# Altium PCB PCB.PcbDoc (part 2 of 3)
Units mm, origin at the board's own origin, x right, y up, seen from the top; angles counter-clockwise.
Board outline 58.5 x 91.95 mm, 2 copper layers (Top Layer, Bottom Layer), stack 1.571 mm thick; 57 components, 46 nets, 183 pads, 18 vias.
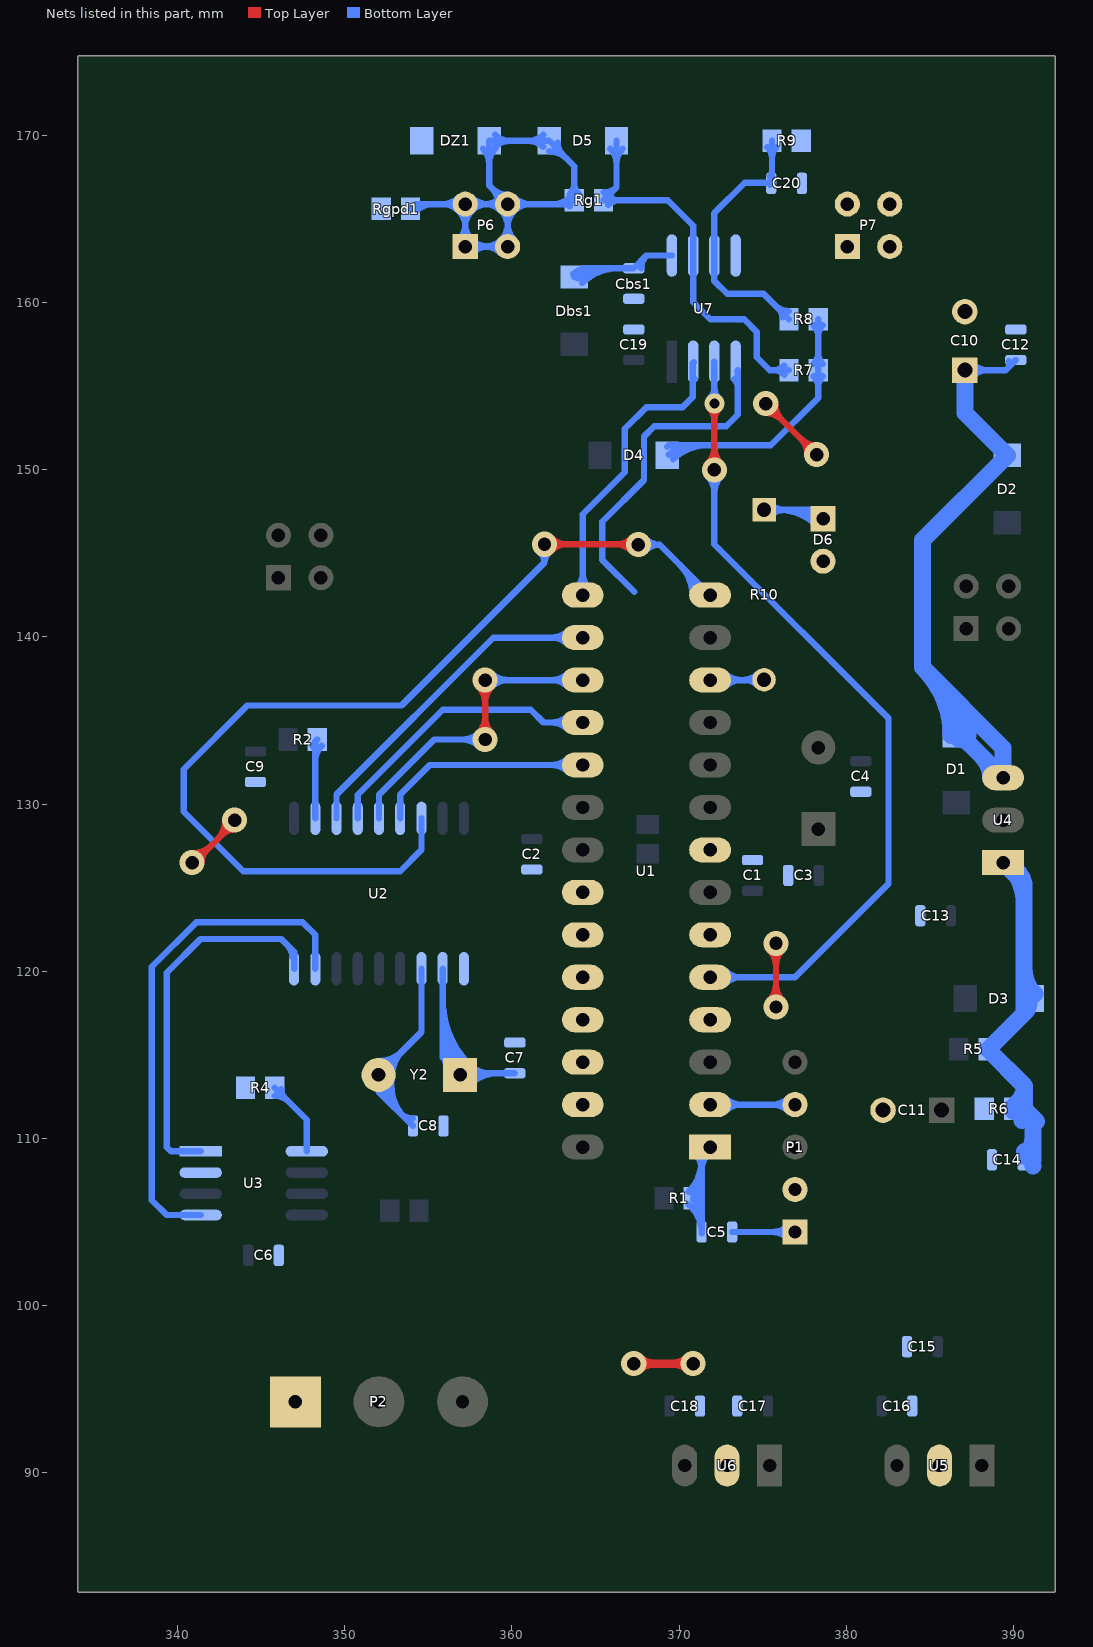
[diagram p2: the nets of this part, all layers, seen from the top]

## Via types
v1: diameter 1.5, hole 0.8, Top Layer to Bottom Layer, 17 vias
v2: diameter 1.2, hole 0.6, Top Layer to Bottom Layer, 1 vias

## Nets (pads, with @x,y where several pads share a name; then routed paths per layer and width w, separated by ;. In a path a pad name is that pad's centre, name@x,y a point inside that pad or via, vN(x,y) a via of type N, cw(c..) or ccw(c..) an arc to the next point about the centre after c; other vN are vias at no path point) (continued)
GATE: D5.1 DZ1.2 P6.1 P6.2 P6.3 P6.4 Rg1.1 Rgpd1.1 | length 170.1
  Bottom Layer w0.381: Rgpd1.1@353.935,165.608 354.215,165.888 P6.2@357.203,165.888 ; Rg1.1@363.5,165.888 P6.4@359.743,165.888 ; Rg1.1@363.728,166.116 363.728,168.165 D5.1@362.221,169.672 DZ1.2@358.631,169.672 358.631,167 P6.4@359.743,165.888 ; Rgpd1.1@354.207,165.436 cw(c355.298,164.345) 355.298,165.888 ; Rgpd1.1@354.207,165.436 cw(c355.298,164.345) 355.298,165.888 ; Rgpd1.1@354.207,165.436 cw(c355.298,164.345) 355.298,165.888 ; Rgpd1.1@354.207,165.436 cw(c355.298,164.345) 355.298,165.888 ; 355.853,165.888 cw(c355.853,164.537) P6.2@356.808,165.492 ; 355.853,165.888 ccw(c355.853,167.239) P6.2@356.808,166.284 ; 355.853,165.888 cw(c355.853,164.537) P6.2@356.808,165.492 ; 355.853,165.888 ccw(c355.853,167.239) P6.2@356.808,166.284 ; 355.853,165.888 cw(c355.853,164.537) P6.2@356.808,165.492 ; 355.853,165.888 ccw(c355.853,167.239) P6.2@356.808,166.284 ; 355.853,165.888 cw(c355.853,164.537) P6.2@356.808,165.492 ; 355.853,165.888 ccw(c355.853,167.239) P6.2@356.808,166.284 ; P6.1@356.808,163.744 ccw(c355.853,164.699) 357.203,164.699 ; P6.1@356.808,163.744 ccw(c355.853,164.699) 357.203,164.699 ; P6.1@356.808,163.744 ccw(c355.853,164.699) 357.203,164.699 ; P6.1@356.808,163.744 ccw(c355.853,164.699) 357.203,164.699 ; P6.2@356.808,165.492 cw(c355.853,164.537) 357.203,164.537 ; P6.2@356.808,165.492 cw(c355.853,164.537) 357.203,164.537 ; P6.2@356.808,165.492 cw(c355.853,164.537) 357.203,164.537 ; P6.2@356.808,165.492 cw(c355.853,164.537) 357.203,164.537 ; 357.203,164.537 cw(c358.554,164.537) P6.2@357.599,165.492 ; 357.203,164.537 cw(c358.554,164.537) P6.2@357.599,165.492 ; 357.203,164.537 cw(c358.554,164.537) P6.2@357.599,165.492 ; 357.203,164.537 cw(c358.554,164.537) P6.2@357.599,165.492 ; 357.203,164.699 ccw(c358.554,164.699) P6.1@357.599,163.744 ; 357.203,164.699 ccw(c358.554,164.699) P6.1@357.599,163.744 ; 357.203,164.699 ccw(c358.554,164.699) P6.1@357.599,163.744 ; 357.203,164.699 ccw(c358.554,164.699) P6.1@357.599,163.744 ; P6.2@357.203,165.888 P6.4@359.743,165.888 ; P6.2@357.203,165.888 P6.1@357.203,163.348 P6.3@359.743,163.348 P6.4@359.743,165.888 ; P6.1@357.599,162.952 cw(c358.554,161.997) 358.554,163.348 ; P6.1@357.599,162.952 cw(c358.554,161.997) 358.554,163.348 ; P6.1@357.599,162.952 cw(c358.554,161.997) 358.554,163.348 ; P6.1@357.599,162.952 cw(c358.554,161.997) 358.554,163.348 ; P6.1@357.599,163.744 ccw(c358.554,164.699) 358.554,163.348 ; P6.1@357.599,163.744 ccw(c358.554,164.699) 358.554,163.348 ; P6.1@357.599,163.744 ccw(c358.554,164.699) 358.554,163.348 ; P6.1@357.599,163.744 ccw(c358.554,164.699) 358.554,163.348 ; P6.2@357.599,165.492 cw(c358.554,164.537) 358.554,165.888 ; P6.2@357.599,165.492 cw(c358.554,164.537) 358.554,165.888 ; P6.2@357.599,165.492 cw(c358.554,164.537) 358.554,165.888 ; P6.2@357.599,165.492 cw(c358.554,164.537) 358.554,165.888 ; P6.2@357.599,166.284 ccw(c358.554,167.239) 358.554,165.888 ; P6.2@357.599,166.284 ccw(c358.554,167.239) 358.554,165.888 ; P6.2@357.599,166.284 ccw(c358.554,167.239) 358.554,165.888 ; P6.2@357.599,166.284 ccw(c358.554,167.239) 358.554,165.888 ; DZ1.2@358.271,169.192 cw(c357.401,168.322) 358.631,168.322 ; DZ1.2@358.271,169.192 cw(c357.401,168.322) 358.631,168.322 ; DZ1.2@358.271,169.192 cw(c357.401,168.322) 358.631,168.322 ; DZ1.2@358.271,169.192 cw(c357.401,168.322) 358.631,168.322 ; 358.393,163.348 cw(c358.393,161.997) P6.3@359.348,162.952 ; 358.393,163.348 ccw(c358.393,164.699) P6.3@359.348,163.744 ; 358.393,163.348 cw(c358.393,161.997) P6.3@359.348,162.952 ; 358.393,163.348 ccw(c358.393,164.699) P6.3@359.348,163.744 ; 358.393,163.348 cw(c358.393,161.997) P6.3@359.348,162.952 ; 358.393,163.348 ccw(c358.393,164.699) P6.3@359.348,163.744 ; 358.393,163.348 cw(c358.393,161.997) P6.3@359.348,162.952 ; 358.393,163.348 ccw(c358.393,164.699) P6.3@359.348,163.744 ; 358.393,165.888 cw(c358.393,164.537) P6.4@359.348,165.492 ; 358.393,165.888 ccw(c358.393,167.239) P6.4@359.348,166.284 ; 358.393,165.888 cw(c358.393,164.537) P6.4@359.348,165.492 ; 358.393,165.888 ccw(c358.393,167.239) P6.4@359.348,166.284 ; 358.393,165.888 cw(c358.393,164.537) P6.4@359.348,165.492 ; 358.393,165.888 ccw(c358.393,167.239) P6.4@359.348,166.284 ; 358.393,165.888 cw(c358.393,164.537) P6.4@359.348,165.492 ; 358.393,165.888 ccw(c358.393,167.239) P6.4@359.348,166.284 ; 358.631,168.322 cw(c359.861,168.322) DZ1.2@358.991,169.192 ; 358.631,168.322 cw(c359.861,168.322) DZ1.2@358.991,169.192 ; 358.631,168.322 cw(c359.861,168.322) DZ1.2@358.991,169.192 ; 358.631,168.322 cw(c359.861,168.322) DZ1.2@358.991,169.192 ; 358.788,166.843 cw(c357.833,165.888) P6.4@359.184,165.888 ; 358.788,166.843 ccw(c359.743,167.798) P6.4@359.743,166.447 ; 358.788,166.843 cw(c357.833,165.888) P6.4@359.184,165.888 ; 358.788,166.843 ccw(c359.743,167.798) P6.4@359.743,166.447 ; 358.788,166.843 cw(c357.833,165.888) P6.4@359.184,165.888 ; 358.788,166.843 ccw(c359.743,167.798) P6.4@359.743,166.447 ; 358.788,166.843 cw(c357.833,165.888) P6.4@359.184,165.888 ; 358.788,166.843 ccw(c359.743,167.798) P6.4@359.743,166.447 ; DZ1.2@358.991,169.312 cw(c359.861,168.442) 359.861,169.672 ; DZ1.2@358.991,169.312 cw(c359.861,168.442) 359.861,169.672 ; DZ1.2@358.991,169.312 cw(c359.861,168.442) 359.861,169.672 ; DZ1.2@358.991,169.312 cw(c359.861,168.442) 359.861,169.672 ; DZ1.2@358.991,170.032 ccw(c359.861,170.902) 359.861,169.672 ; DZ1.2@358.991,170.032 ccw(c359.861,170.902) 359.861,169.672 ; DZ1.2@358.991,170.032 ccw(c359.861,170.902) 359.861,169.672 ; DZ1.2@358.991,170.032 ccw(c359.861,170.902) 359.861,169.672 ; P6.3@359.348,163.744 ccw(c358.393,164.699) 359.743,164.699 ; P6.3@359.348,163.744 ccw(c358.393,164.699) 359.743,164.699 ; P6.3@359.348,163.744 ccw(c358.393,164.699) 359.743,164.699 ; P6.3@359.348,163.744 ccw(c358.393,164.699) 359.743,164.699 ; P6.4@359.348,165.492 cw(c358.393,164.537) 359.743,164.537 ; P6.4@359.348,165.492 cw(c358.393,164.537) 359.743,164.537 ; P6.4@359.348,165.492 cw(c358.393,164.537) 359.743,164.537 ; P6.4@359.348,165.492 cw(c358.393,164.537) 359.743,164.537 ; 359.743,164.537 cw(c361.094,164.537) P6.4@360.139,165.492 ; 359.743,164.537 cw(c361.094,164.537) P6.4@360.139,165.492 ; 359.743,164.537 cw(c361.094,164.537) P6.4@360.139,165.492 ; 359.743,164.537 cw(c361.094,164.537) P6.4@360.139,165.492 ; 359.743,164.699 ccw(c361.094,164.699) P6.3@360.139,163.744 ; 359.743,164.699 ccw(c361.094,164.699) P6.3@360.139,163.744 ; 359.743,164.699 ccw(c361.094,164.699) P6.3@360.139,163.744 ; 359.743,164.699 ccw(c361.094,164.699) P6.3@360.139,163.744 ; P6.4@360.139,165.492 cw(c361.094,164.537) 361.094,165.888 ; P6.4@360.139,165.492 cw(c361.094,164.537) 361.094,165.888 ; P6.4@360.139,165.492 cw(c361.094,164.537) 361.094,165.888 ; P6.4@360.139,165.492 cw(c361.094,164.537) 361.094,165.888 ; P6.4@360.139,166.284 ccw(c361.094,167.239) 361.094,165.888 ; P6.4@360.139,166.284 ccw(c361.094,167.239) 361.094,165.888 ; P6.4@360.139,166.284 ccw(c361.094,167.239) 361.094,165.888 ; P6.4@360.139,166.284 ccw(c361.094,167.239) 361.094,165.888 ; 360.991,169.672 cw(c360.991,168.442) D5.1@361.861,169.312 ; 360.991,169.672 ccw(c360.991,170.902) D5.1@361.861,170.032 ; 360.991,169.672 cw(c360.991,168.442) D5.1@361.861,169.312 ; 360.991,169.672 ccw(c360.991,170.902) D5.1@361.861,170.032 ; 360.991,169.672 cw(c360.991,168.442) D5.1@361.861,169.312 ; 360.991,169.672 ccw(c360.991,170.902) D5.1@361.861,170.032 ; 360.991,169.672 cw(c360.991,168.442) D5.1@361.861,169.312 ; 360.991,169.672 ccw(c360.991,170.902) D5.1@361.861,170.032 ; D5.1@362.221,169.043 cw(c362.221,167.523) 363.296,168.597 ; D5.1@362.221,169.043 cw(c362.221,167.523) 363.296,168.597 ; D5.1@362.221,169.043 cw(c362.221,167.523) 363.296,168.597 ; D5.1@362.221,169.043 cw(c362.221,167.523) 363.296,168.597 ; 362.491,165.888 ccw(c362.491,167.253) Rg1.1@363.456,166.288 ; 362.491,165.888 ccw(c362.491,167.253) Rg1.1@363.456,166.288 ; 362.491,165.888 ccw(c362.491,167.253) Rg1.1@363.456,166.288 ; 362.491,165.888 ccw(c362.491,167.253) Rg1.1@363.456,166.288 ; D5.1@362.73,169.552 ccw(c363.671,169.552) 363.006,168.887 ; D5.1@362.73,169.552 ccw(c363.671,169.552) 363.006,168.887 ; D5.1@362.73,169.552 ccw(c363.671,169.552) 363.006,168.887 ; D5.1@362.73,169.552 ccw(c363.671,169.552) 363.006,168.887 ; 363.109,165.888 cw(c363.109,165.397) Rg1.1@363.456,165.744 ; 363.109,165.888 cw(c363.109,165.397) Rg1.1@363.456,165.744 ; 363.109,165.888 cw(c363.109,165.397) Rg1.1@363.456,165.744 ; 363.109,165.888 cw(c363.109,165.397) Rg1.1@363.456,165.744 ; Rg1.1@363.456,166.488 ccw(c362.8,167.144) 363.728,167.144 ; Rg1.1@363.456,166.488 ccw(c362.8,167.144) 363.728,167.144 ; Rg1.1@363.456,166.488 ccw(c362.8,167.144) 363.728,167.144 ; Rg1.1@363.456,166.488 ccw(c362.8,167.144) 363.728,167.144 ; 363.728,167.144 ccw(c364.656,167.144) Rg1.1@364,166.488 ; 363.728,167.144 ccw(c364.656,167.144) Rg1.1@364,166.488 ; 363.728,167.144 ccw(c364.656,167.144) Rg1.1@364,166.488 ; 363.728,167.144 ccw(c364.656,167.144) Rg1.1@364,166.488
IR2127_FAULT: U1.5 U7.3 | length 86.4
  Top Layer w0.381: v1(372.11,149.987) v2(372.11,153.949) ; v1@371.714,150.383 ccw(c370.759,151.338) 372.11,151.338 ; v1@371.714,150.383 ccw(c370.759,151.338) 372.11,151.338 ; v1@371.714,150.383 ccw(c370.759,151.338) 372.11,151.338 ; v1@371.714,150.383 ccw(c370.759,151.338) 372.11,151.338 ; v2@371.82,153.66 cw(c371.121,152.961) 372.11,152.961 ; v2@371.82,153.66 cw(c371.121,152.961) 372.11,152.961 ; v2@371.82,153.66 cw(c371.121,152.961) 372.11,152.961 ; v2@371.82,153.66 cw(c371.121,152.961) 372.11,152.961 ; 372.11,151.338 ccw(c373.461,151.338) v1@372.506,150.383 ; 372.11,151.338 ccw(c373.461,151.338) v1@372.506,150.383 ; 372.11,151.338 ccw(c373.461,151.338) v1@372.506,150.383 ; 372.11,151.338 ccw(c373.461,151.338) v1@372.506,150.383 ; 372.11,152.961 cw(c373.099,152.961) v2@372.4,153.66 ; 372.11,152.961 cw(c373.099,152.961) v2@372.4,153.66 ; 372.11,152.961 cw(c373.099,152.961) v2@372.4,153.66 ; 372.11,152.961 cw(c373.099,152.961) v2@372.4,153.66
  Bottom Layer w0.381: U1.5@371.856,119.634 376.936,119.634 382.524,125.222 382.524,135.128 372.11,145.542 v1@372.11,150.038 ; v2@372.11,154.026 U7.3@372.11,156.464 ; v1@371.714,149.591 cw(c370.759,148.636) 372.11,148.636 ; v1@371.714,149.591 cw(c370.759,148.636) 372.11,148.636 ; v1@371.714,149.591 cw(c370.759,148.636) 372.11,148.636 ; v1@371.714,149.591 cw(c370.759,148.636) 372.11,148.636 ; v2@371.82,154.239 ccw(c371.121,154.938) 372.11,154.938 ; v2@371.82,154.239 ccw(c371.121,154.938) 372.11,154.938 ; v2@371.82,154.239 ccw(c371.121,154.938) 372.11,154.938 ; v2@371.82,154.239 ccw(c371.121,154.938) 372.11,154.938 ; 372.11,148.636 cw(c373.461,148.636) v1@372.506,149.591 ; 372.11,148.636 cw(c373.461,148.636) v1@372.506,149.591 ; 372.11,148.636 cw(c373.461,148.636) v1@372.506,149.591 ; 372.11,148.636 cw(c373.461,148.636) v1@372.506,149.591 ; 372.11,154.938 ccw(c373.099,154.938) v2@372.4,154.239 ; 372.11,154.938 ccw(c373.099,154.938) v2@372.4,154.239 ; 372.11,154.938 ccw(c373.099,154.938) v2@372.4,154.239 ; 372.11,154.938 ccw(c373.099,154.938) v2@372.4,154.239 ; U1.5@372.752,119.238 cw(c373.707,118.283) 373.707,119.634 ; U1.5@372.752,119.238 cw(c373.707,118.283) 373.707,119.634 ; U1.5@372.752,119.238 cw(c373.707,118.283) 373.707,119.634 ; U1.5@372.752,119.238 cw(c373.707,118.283) 373.707,119.634 ; U1.5@372.752,120.03 ccw(c373.707,120.985) 373.707,119.634 ; U1.5@372.752,120.03 ccw(c373.707,120.985) 373.707,119.634 ; U1.5@372.752,120.03 ccw(c373.707,120.985) 373.707,119.634 ; U1.5@372.752,120.03 ccw(c373.707,120.985) 373.707,119.634
LED: R10.2 U1.12 | length 19.5
  Bottom Layer w0.381: U1.12@371.856,137.414 375.056,137.414 R10.2@375.082,137.439 ; U1.12@372.752,137.018 cw(c373.707,136.063) 373.707,137.414 ; U1.12@372.752,137.018 cw(c373.707,136.063) 373.707,137.414 ; U1.12@372.752,137.018 cw(c373.707,136.063) 373.707,137.414 ; U1.12@372.752,137.018 cw(c373.707,136.063) 373.707,137.414 ; U1.12@372.752,137.81 ccw(c373.707,138.765) 373.707,137.414 ; U1.12@372.752,137.81 ccw(c373.707,138.765) 373.707,137.414 ; U1.12@372.752,137.81 ccw(c373.707,138.765) 373.707,137.414 ; U1.12@372.752,137.81 ccw(c373.707,138.765) 373.707,137.414 ; 373.79,137.414 ccw(c373.79,138.731) R10.2@374.722,137.8 ; 373.79,137.414 ccw(c373.79,138.731) R10.2@374.722,137.8 ; 373.79,137.414 ccw(c373.79,138.731) R10.2@374.722,137.8 ; 373.79,137.414 ccw(c373.79,138.731) R10.2@374.722,137.8 ; 373.913,137.414 cw(c373.913,136.271) R10.2@374.722,137.079 ; 373.913,137.414 cw(c373.913,136.271) R10.2@374.722,137.079 ; 373.913,137.414 cw(c373.913,136.271) R10.2@374.722,137.079 ; 373.913,137.414 cw(c373.913,136.271) R10.2@374.722,137.079
MCP2515_INT: U1.14 U2.12 | length 103.4
  Top Layer w0.381: v1(361.95,145.542) v1@367.563,145.542 ; v1@362.346,145.146 cw(c363.301,144.191) 363.301,145.542 ; v1@362.346,145.146 cw(c363.301,144.191) 363.301,145.542 ; v1@362.346,145.146 cw(c363.301,144.191) 363.301,145.542 ; v1@362.346,145.146 cw(c363.301,144.191) 363.301,145.542 ; v1@362.346,145.938 ccw(c363.301,146.893) 363.301,145.542 ; v1@362.346,145.938 ccw(c363.301,146.893) 363.301,145.542 ; v1@362.346,145.938 ccw(c363.301,146.893) 363.301,145.542 ; v1@362.346,145.938 ccw(c363.301,146.893) 363.301,145.542 ; 366.151,145.542 cw(c366.151,144.105) v1@367.168,145.121 ; 366.151,145.542 cw(c366.151,144.105) v1@367.168,145.121 ; 366.151,145.542 cw(c366.151,144.105) v1@367.168,145.121 ; 366.151,145.542 cw(c366.151,144.105) v1@367.168,145.121 ; 366.274,145.542 ccw(c366.274,146.806) v1@367.168,145.912 ; 366.274,145.542 ccw(c366.274,146.806) v1@367.168,145.912 ; 366.274,145.542 ccw(c366.274,146.806) v1@367.168,145.912 ; 366.274,145.542 ccw(c366.274,146.806) v1@367.168,145.912
  Bottom Layer w0.381: U2.12@354.584,129.142 354.584,127.254 353.314,125.984 343.916,125.984 340.36,129.54 340.36,132.08 344.17,135.89 353.39,135.89 361.95,144.45 ; v1(361.95,145.542) 361.95,144.45 ; v1(367.563,145.517) 368.833,145.517 ; U1.14@371.856,142.494 368.833,145.517 ; v1@361.623,145.088 cw(c361.164,144.45) 361.95,144.45 ; v1@361.623,145.088 cw(c361.164,144.45) 361.95,144.45 ; v1@361.623,145.088 cw(c361.164,144.45) 361.95,144.45 ; v1@361.623,145.088 cw(c361.164,144.45) 361.95,144.45 ; 361.95,144.45 cw(c362.736,144.45) v1@362.277,145.088 ; 361.95,144.45 cw(c362.736,144.45) v1@362.277,145.088 ; 361.95,144.45 cw(c362.736,144.45) v1@362.277,145.088 ; 361.95,144.45 cw(c362.736,144.45) v1@362.277,145.088 ; v1@367.976,145.139 cw(c368.833,144.355) 368.833,145.517 ; v1@367.976,145.139 cw(c368.833,144.355) 368.833,145.517 ; v1@367.976,145.139 cw(c368.833,144.355) 368.833,145.517 ; v1@367.976,145.139 cw(c368.833,144.355) 368.833,145.517 ; v1@367.976,145.894 ccw(c368.833,146.678) 368.833,145.517 ; v1@367.976,145.894 ccw(c368.833,146.678) 368.833,145.517 ; v1@367.976,145.894 ccw(c368.833,146.678) 368.833,145.517 ; v1@367.976,145.894 ccw(c368.833,146.678) 368.833,145.517 ; 370.047,144.303 cw(c368.239,142.494) U1.14@370.796,142.494 ; 370.047,144.303 cw(c368.239,142.494) U1.14@370.796,142.494 ; 370.047,144.303 cw(c368.239,142.494) U1.14@370.796,142.494 ; 370.047,144.303 cw(c368.239,142.494) U1.14@370.796,142.494 ; 370.698,143.652 cw(c369.539,142.494) U1.14@371.177,142.494 ; 370.698,143.652 cw(c369.539,142.494) U1.14@371.177,142.494 ; 370.698,143.652 cw(c369.539,142.494) U1.14@371.177,142.494 ; 370.698,143.652 cw(c369.539,142.494) U1.14@371.177,142.494
MCP2515_MISO: U1.18 U2.15 | length 25.8
  Bottom Layer w0.381: U2.15@350.774,129.142 350.774,130.543 355.867,135.636 361.125,135.636 361.887,134.874 U1.18@364.236,134.874 ; 362.385,134.874 cw(c362.385,133.523) U1.18@363.34,134.478 ; 362.385,134.874 ccw(c362.385,136.225) U1.18@363.34,135.27 ; 362.385,134.874 cw(c362.385,133.523) U1.18@363.34,134.478 ; 362.385,134.874 ccw(c362.385,136.225) U1.18@363.34,135.27 ; 362.385,134.874 cw(c362.385,133.523) U1.18@363.34,134.478 ; 362.385,134.874 ccw(c362.385,136.225) U1.18@363.34,135.27 ; 362.385,134.874 cw(c362.385,133.523) U1.18@363.34,134.478 ; 362.385,134.874 ccw(c362.385,136.225) U1.18@363.34,135.27
MCP2515_MOSI: U1.17 U2.14 | length 61
  Top Layer w0.381: v1(358.394,133.858) v1(358.394,137.414) ; v1@357.998,134.254 ccw(c357.043,135.209) 358.394,135.209 ; v1@357.998,134.254 ccw(c357.043,135.209) 358.394,135.209 ; v1@357.998,134.254 ccw(c357.043,135.209) 358.394,135.209 ; v1@357.998,134.254 ccw(c357.043,135.209) 358.394,135.209 ; v1@357.998,137.018 cw(c357.043,136.063) 358.394,136.063 ; v1@357.998,137.018 cw(c357.043,136.063) 358.394,136.063 ; v1@357.998,137.018 cw(c357.043,136.063) 358.394,136.063 ; v1@357.998,137.018 cw(c357.043,136.063) 358.394,136.063 ; 358.394,135.209 ccw(c359.745,135.209) v1@358.79,134.254 ; 358.394,135.209 ccw(c359.745,135.209) v1@358.79,134.254 ; 358.394,135.209 ccw(c359.745,135.209) v1@358.79,134.254 ; 358.394,135.209 ccw(c359.745,135.209) v1@358.79,134.254 ; 358.394,136.063 cw(c359.745,136.063) v1@358.79,137.018 ; 358.394,136.063 cw(c359.745,136.063) v1@358.79,137.018 ; 358.394,136.063 cw(c359.745,136.063) v1@358.79,137.018 ; 358.394,136.063 cw(c359.745,136.063) v1@358.79,137.018
  Bottom Layer w0.381: U2.14@352.044,129.142 352.044,130.556 355.346,133.858 v1(358.394,133.858) ; v1(358.394,137.414) U1.17@364.236,137.414 ; 357.043,133.858 cw(c357.043,132.507) v1@357.998,133.462 ; 357.043,133.858 ccw(c357.043,135.209) v1@357.998,134.254 ; 357.043,133.858 cw(c357.043,132.507) v1@357.998,133.462 ; 357.043,133.858 ccw(c357.043,135.209) v1@357.998,134.254 ; 357.043,133.858 cw(c357.043,132.507) v1@357.998,133.462 ; 357.043,133.858 ccw(c357.043,135.209) v1@357.998,134.254 ; 357.043,133.858 cw(c357.043,132.507) v1@357.998,133.462 ; 357.043,133.858 ccw(c357.043,135.209) v1@357.998,134.254 ; v1@358.79,137.018 cw(c359.745,136.063) 359.745,137.414 ; v1@358.79,137.018 cw(c359.745,136.063) 359.745,137.414 ; v1@358.79,137.018 cw(c359.745,136.063) 359.745,137.414 ; v1@358.79,137.018 cw(c359.745,136.063) 359.745,137.414 ; v1@358.79,137.81 ccw(c359.745,138.765) 359.745,137.414 ; v1@358.79,137.81 ccw(c359.745,138.765) 359.745,137.414 ; v1@358.79,137.81 ccw(c359.745,138.765) 359.745,137.414 ; v1@358.79,137.81 ccw(c359.745,138.765) 359.745,137.414 ; 362.385,137.414 cw(c362.385,136.063) U1.17@363.34,137.018 ; 362.385,137.414 ccw(c362.385,138.765) U1.17@363.34,137.81 ; 362.385,137.414 cw(c362.385,136.063) U1.17@363.34,137.018 ; 362.385,137.414 ccw(c362.385,138.765) U1.17@363.34,137.81 ; 362.385,137.414 cw(c362.385,136.063) U1.17@363.34,137.018 ; 362.385,137.414 ccw(c362.385,138.765) U1.17@363.34,137.81 ; 362.385,137.414 cw(c362.385,136.063) U1.17@363.34,137.018 ; 362.385,137.414 ccw(c362.385,138.765) U1.17@363.34,137.81
MCP2515_SCK: U1.19 U2.13 | length 21.6
  Bottom Layer w0.381: U2.13@353.314,129.142 353.314,130.569 355.079,132.334 U1.19@364.236,132.334 ; 362.385,132.334 cw(c362.385,130.983) U1.19@363.34,131.938 ; 362.385,132.334 ccw(c362.385,133.685) U1.19@363.34,132.73 ; 362.385,132.334 cw(c362.385,130.983) U1.19@363.34,131.938 ; 362.385,132.334 ccw(c362.385,133.685) U1.19@363.34,132.73 ; 362.385,132.334 cw(c362.385,130.983) U1.19@363.34,131.938 ; 362.385,132.334 ccw(c362.385,133.685) U1.19@363.34,132.73 ; 362.385,132.334 cw(c362.385,130.983) U1.19@363.34,131.938 ; 362.385,132.334 ccw(c362.385,133.685) U1.19@363.34,132.73
MCP2515_SS: U1.16 U2.16 | length 28.5
  Bottom Layer w0.381: U2.16@349.504,129.142 349.504,130.572 358.886,139.954 U1.16@364.236,139.954 ; 362.385,139.954 cw(c362.385,138.603) U1.16@363.34,139.558 ; 362.385,139.954 ccw(c362.385,141.305) U1.16@363.34,140.35 ; 362.385,139.954 cw(c362.385,138.603) U1.16@363.34,139.558 ; 362.385,139.954 ccw(c362.385,141.305) U1.16@363.34,140.35 ; 362.385,139.954 cw(c362.385,138.603) U1.16@363.34,139.558 ; 362.385,139.954 ccw(c362.385,141.305) U1.16@363.34,140.35 ; 362.385,139.954 cw(c362.385,138.603) U1.16@363.34,139.558 ; 362.385,139.954 ccw(c362.385,141.305) U1.16@363.34,140.35
MOTOR_I: U1.25
MOTOR_RPM: U1.4
MOTOR_T: U1.26
MOTOR_V: U1.24
NetC5_1: C5.1 R1.2 U1.1 | length 45.7
  Bottom Layer w0.381: C5.1@371.348,104.394 371.348,108.966 U1.1@371.856,109.474 ; R1.2@370.568,106.798 ccw(c368.685,108.681) 371.348,108.681 ; R1.2@370.568,106.798 ccw(c368.685,108.681) 371.348,108.681 ; R1.2@370.568,106.798 ccw(c368.685,108.681) 371.348,108.681 ; R1.2@370.568,106.798 ccw(c368.685,108.681) 371.348,108.681 ; R1.2@370.583,106.04 cw(c369.051,104.328) C5.1@371.348,104.328 ; R1.2@370.583,106.04 cw(c369.051,104.328) C5.1@371.348,104.328 ; R1.2@370.583,106.04 cw(c369.051,104.328) C5.1@371.348,104.328 ; R1.2@370.583,106.04 cw(c369.051,104.328) C5.1@371.348,104.328 ; R1.2@370.838,106.323 cw(c369.815,105.181) 371.348,105.181 ; R1.2@370.838,106.323 cw(c369.815,105.181) 371.348,105.181 ; R1.2@370.838,106.323 cw(c369.815,105.181) 371.348,105.181 ; R1.2@370.838,106.323 cw(c369.815,105.181) 371.348,105.181 ; R1.2@370.838,106.528 ccw(c369.605,107.761) 371.348,107.761 ; R1.2@370.838,106.528 ccw(c369.605,107.761) 371.348,107.761 ; R1.2@370.838,106.528 ccw(c369.605,107.761) 371.348,107.761 ; R1.2@370.838,106.528 ccw(c369.605,107.761) 371.348,107.761 ; U1.1@370.96,109.078 cw(c370.025,108.143) 371.348,108.143 ; U1.1@370.96,109.078 cw(c370.025,108.143) 371.348,108.143 ; U1.1@370.96,109.078 cw(c370.025,108.143) 371.348,108.143 ; U1.1@370.96,109.078 cw(c370.025,108.143) 371.348,108.143 ; R1.2@371.092,106.607 cw(c370.578,106.034) R1.2@371.348,106.034 ; R1.2@371.092,106.607 cw(c370.578,106.034) R1.2@371.348,106.034 ; R1.2@371.092,106.607 cw(c370.578,106.034) R1.2@371.348,106.034 ; R1.2@371.092,106.607 cw(c370.578,106.034) R1.2@371.348,106.034 ; R1.2@371.107,106.259 ccw(c370.525,106.841) R1.2@371.348,106.841 ; R1.2@371.107,106.259 ccw(c370.525,106.841) R1.2@371.348,106.841 ; R1.2@371.107,106.259 ccw(c370.525,106.841) R1.2@371.348,106.841 ; R1.2@371.107,106.259 ccw(c370.525,106.841) R1.2@371.348,106.841 ; R1.2@371.346,106.891 cw(c371.342,106.887) R1.2@371.348,106.887 ; R1.2@371.346,106.891 cw(c371.342,106.887) R1.2@371.348,106.887 ; R1.2@371.346,106.891 cw(c371.342,106.887) R1.2@371.348,106.887 ; R1.2@371.346,106.891 cw(c371.342,106.887) R1.2@371.348,106.887 ; 371.348,108.104 cw(c372.726,108.104) U1.1@371.752,109.078 ; 371.348,108.104 cw(c372.726,108.104) U1.1@371.752,109.078 ; 371.348,108.104 cw(c372.726,108.104) U1.1@371.752,109.078 ; 371.348,108.104 cw(c372.726,108.104) U1.1@371.752,109.078
NetC7_2: C7.2 U2.8 Y2.1 | length 79.5
  Bottom Layer w0.381: U2.8@355.854,120.142 355.854,114.835 Y2.1@356.897,113.792 356.999,113.894 C7.2@360.172,113.894 ; 355.854,115.544 ccw(c358.649,115.544) Y2.1@356.672,113.567 ; 355.854,115.544 ccw(c358.649,115.544) Y2.1@356.672,113.567 ; 355.854,115.544 ccw(c358.649,115.544) Y2.1@356.672,113.567 ; 355.854,115.544 ccw(c358.649,115.544) Y2.1@356.672,113.567 ; 355.854,116.463 ccw(c359.568,116.463) Y2.1@356.942,113.837 ; 355.854,116.463 ccw(c359.568,116.463) Y2.1@356.942,113.837 ; 355.854,116.463 ccw(c359.568,116.463) Y2.1@356.942,113.837 ; 355.854,116.463 ccw(c359.568,116.463) Y2.1@356.942,113.837 ; 355.854,117.383 ccw(c360.488,117.383) Y2.1@357.211,114.106 ; 355.854,117.383 ccw(c360.488,117.383) Y2.1@357.211,114.106 ; 355.854,117.383 ccw(c360.488,117.383) Y2.1@357.211,114.106 ; 355.854,117.383 ccw(c360.488,117.383) Y2.1@357.211,114.106 ; 355.854,118.303 ccw(c361.408,118.303) Y2.1@357.481,114.376 ; 355.854,118.303 ccw(c361.408,118.303) Y2.1@357.481,114.376 ; 355.854,118.303 ccw(c361.408,118.303) Y2.1@357.481,114.376 ; 355.854,118.303 ccw(c361.408,118.303) Y2.1@357.481,114.376 ; Y2.1@357.211,113.478 cw(c358.215,112.474) 358.215,113.894 ; Y2.1@357.211,113.478 cw(c358.215,112.474) 358.215,113.894 ; Y2.1@357.211,113.478 cw(c358.215,112.474) 358.215,113.894 ; Y2.1@357.211,113.478 cw(c358.215,112.474) 358.215,113.894 ; Y2.1@357.481,113.208 cw(c359.135,111.554) 359.135,113.894 ; Y2.1@357.481,113.208 cw(c359.135,111.554) 359.135,113.894 ; Y2.1@357.481,113.208 cw(c359.135,111.554) 359.135,113.894 ; Y2.1@357.481,113.208 cw(c359.135,111.554) 359.135,113.894 ; Y2.1@357.481,114.376 ccw(c358.645,115.54) 358.645,113.894 ; Y2.1@357.481,114.376 ccw(c358.645,115.54) 358.645,113.894 ; Y2.1@357.481,114.376 ccw(c358.645,115.54) 358.645,113.894 ; Y2.1@357.481,114.376 ccw(c358.645,115.54) 358.645,113.894
NetC8_2: C8.2 U2.7 Y2.2 | length 59.6
  Bottom Layer w0.381: C8.2@354.076,110.744 352.017,112.803 Y2.2@352.017,113.792 354.584,116.359 U2.7@354.584,120.142 ; Y2.2@352.017,114.236 ccw(c352.017,115.31) 352.776,114.551 ; Y2.2@352.017,114.236 ccw(c352.017,115.31) 352.776,114.551 ; Y2.2@352.017,114.236 ccw(c352.017,115.31) 352.776,114.551 ; Y2.2@352.017,114.236 ccw(c352.017,115.31) 352.776,114.551 ; Y2.2@352.017,114.617 ccw(c352.017,116.61) 353.426,115.201 ; Y2.2@352.017,114.617 ccw(c352.017,116.61) 353.426,115.201 ; Y2.2@352.017,114.617 ccw(c352.017,116.61) 353.426,115.201 ; Y2.2@352.017,114.617 ccw(c352.017,116.61) 353.426,115.201 ; Y2.2@352.079,113.781 ccw(c353.761,113.476) 352.553,112.267 ; Y2.2@352.079,113.781 ccw(c353.761,113.476) 352.553,112.267 ; Y2.2@352.079,113.781 ccw(c353.761,113.476) 352.553,112.267 ; Y2.2@352.079,113.781 ccw(c353.761,113.476) 352.553,112.267 ; Y2.2@352.454,113.713 ccw(c354.632,113.318) 353.067,111.753 ; Y2.2@352.454,113.713 ccw(c354.632,113.318) 353.067,111.753 ; Y2.2@352.454,113.713 ccw(c354.632,113.318) 353.067,111.753 ; Y2.2@352.454,113.713 ccw(c354.632,113.318) 353.067,111.753 ; Y2.2@352.461,113.792 cw(c353.535,113.792) 352.776,114.551 ; Y2.2@352.461,113.792 cw(c353.535,113.792) 352.776,114.551 ; Y2.2@352.461,113.792 cw(c353.535,113.792) 352.776,114.551 ; Y2.2@352.461,113.792 cw(c353.535,113.792) 352.776,114.551 ; Y2.2@352.829,113.645 ccw(c355.503,113.16) 353.581,111.239 ; Y2.2@352.829,113.645 ccw(c355.503,113.16) 353.581,111.239 ; Y2.2@352.829,113.645 ccw(c355.503,113.16) 353.581,111.239 ; Y2.2@352.829,113.645 ccw(c355.503,113.16) 353.581,111.239 ; Y2.2@352.842,113.792 cw(c354.835,113.792) 353.426,115.201 ; Y2.2@352.842,113.792 cw(c354.835,113.792) 353.426,115.201 ; Y2.2@352.842,113.792 cw(c354.835,113.792) 353.426,115.201 ; Y2.2@352.842,113.792 cw(c354.835,113.792) 353.426,115.201 ; 353.317,111.503 ccw(c354.076,112.262) C8.2@354.076,111.188 ; 353.317,111.503 ccw(c354.076,112.262) C8.2@354.076,111.188 ; 353.317,111.503 ccw(c354.076,112.262) C8.2@354.076,111.188 ; 353.317,111.503 ccw(c354.076,112.262) C8.2@354.076,111.188
NetC10_1: C10.1 C12.2 D1.2 D2.2 U4.3 | length 83.3
  Bottom Layer w0.381: C10.1@387.096,155.956 389.534,155.956 C12.2@390.144,156.566 ; C10.1@387.5,155.552 cw(c388.476,154.576) 388.476,155.956 ; C10.1@387.5,155.552 cw(c388.476,154.576) 388.476,155.956 ; C10.1@387.5,155.552 cw(c388.476,154.576) 388.476,155.956 ; C10.1@387.5,155.552 cw(c388.476,154.576) 388.476,155.956 ; C10.1@387.5,156.36 ccw(c388.476,157.336) 388.476,155.956 ; C10.1@387.5,156.36 ccw(c388.476,157.336) 388.476,155.956 ; C10.1@387.5,156.36 ccw(c388.476,157.336) 388.476,155.956 ; C10.1@387.5,156.36 ccw(c388.476,157.336) 388.476,155.956 ; 389.7,156.121 ccw(c389.499,156.322) C12.2@389.723,156.496 ; 389.7,156.121 ccw(c389.499,156.322) C12.2@389.723,156.496 ; 389.7,156.121 ccw(c389.499,156.322) C12.2@389.723,156.496 ; 389.7,156.121 ccw(c389.499,156.322) C12.2@389.723,156.496
  Bottom Layer w1.016: D1.2@386.588,134.095 386.859,134.095 U4.3@389.382,131.572 389.382,133.35 384.573,138.159 384.573,145.796 D2.2@389.636,150.859 387.096,153.399 C10.1@387.096,155.956 ; 384.607,138.125 cw(c380.576,134.095) D1.2@386.276,134.095 ; 384.607,138.125 cw(c380.576,134.095) D1.2@386.276,134.095 ; 384.607,138.125 cw(c380.576,134.095) D1.2@386.276,134.095 ; 384.607,138.125 cw(c380.576,134.095) D1.2@386.276,134.095 ; 386.341,136.391 cw(c384.045,134.095) D1.2@387.292,134.095 ; 386.341,136.391 cw(c384.045,134.095) D1.2@387.292,134.095 ; 386.341,136.391 cw(c384.045,134.095) D1.2@387.292,134.095 ; 386.341,136.391 cw(c384.045,134.095) D1.2@387.292,134.095 ; D1.2@386.708,133.903 cw(c386.708,133.075) D1.2@387.294,133.66 ; D1.2@386.708,133.903 cw(c386.708,133.075) D1.2@387.294,133.66 ; D1.2@386.708,133.903 cw(c386.708,133.075) D1.2@387.294,133.66 ; D1.2@386.708,133.903 cw(c386.708,133.075) D1.2@387.294,133.66 ; 388.115,132.839 cw(c386.849,131.572) U4.3@388.64,131.572 ; 388.115,132.839 cw(c386.849,131.572) U4.3@388.64,131.572 ; 388.115,132.839 cw(c386.849,131.572) U4.3@388.64,131.572 ; 388.115,132.839 cw(c386.849,131.572) U4.3@388.64,131.572
NetC14_2: C14.2 D3.1 R5.1 R6.2 U4.1 | length 73.6
  Bottom Layer w1.016: U4.1@389.382,126.492 390.635,125.239 390.635,121.92 390.635,117.472 R5.1@388.479,115.316 390.652,113.143 ; 391.16,108.712 391.16,111.252 390.652,111.76 390.652,113.143 ; U4.1@389.711,126.321 cw(c387.48,124.09) 390.635,124.09 ; U4.1@389.711,126.321 cw(c387.48,124.09) 390.635,124.09 ; U4.1@389.711,126.321 cw(c387.48,124.09) 390.635,124.09 ; U4.1@389.711,126.321 cw(c387.48,124.09) 390.635,124.09 ; U4.1@389.793,126.267 cw(c389.306,125.03) 390.635,125.03 ; U4.1@389.793,126.267 cw(c389.306,125.03) 390.635,125.03 ; U4.1@389.793,126.267 cw(c389.306,125.03) 390.635,125.03 ; U4.1@389.793,126.267 cw(c389.306,125.03) 390.635,125.03 ; R6.2@389.968,111.917 ccw(c389.212,113.143) 390.652,113.143 ; R6.2@389.968,111.917 ccw(c389.212,113.143) 390.652,113.143 ; R6.2@389.968,111.917 ccw(c389.212,113.143) 390.652,113.143 ; R6.2@389.968,111.917 ccw(c389.212,113.143) 390.652,113.143 ; R6.2@390.003,111.593 cw(c390.003,109.623) 391.396,111.016 ; R6.2@390.003,111.593 cw(c390.003,109.623) 391.396,111.016 ; R6.2@390.003,111.593 cw(c390.003,109.623) 391.396,111.016 ; R6.2@390.003,111.593 cw(c390.003,109.623) 391.396,111.016 ; U4.1@390.117,126.436 ccw(c391.098,126.202) 390.385,125.489 ; U4.1@390.117,126.436 ccw(c391.098,126.202) 390.385,125.489 ; U4.1@390.117,126.436 ccw(c391.098,126.202) 390.385,125.489 ; U4.1@390.117,126.436 ccw(c391.098,126.202) 390.385,125.489 ; 390.501,111.052 ccw(c390.335,111.322) 390.652,111.322 ; 390.501,111.052 ccw(c390.335,111.322) 390.652,111.322 ; 390.501,111.052 ccw(c390.335,111.322) 390.652,111.322 ; 390.501,111.052 ccw(c390.335,111.322) 390.652,111.322 ; 390.629,117.466 ccw(c389.85,118.244) D3.1@390.951,118.244 ; 390.629,117.466 ccw(c389.85,118.244) D3.1@390.951,118.244 ; 390.629,117.466 ccw(c389.85,118.244) D3.1@390.951,118.244 ; 390.629,117.466 ccw(c389.85,118.244) D3.1@390.951,118.244 ; 390.635,120.174 ccw(c392.833,120.174) D3.1@391.279,118.62 ; 390.635,120.174 ccw(c392.833,120.174) D3.1@391.279,118.62 ; 390.635,120.174 ccw(c392.833,120.174) D3.1@391.279,118.62 ; 390.635,120.174 ccw(c392.833,120.174) D3.1@391.279,118.62 ; C14.2@390.65,109.22 cw(c390.162,108.349) 391.16,108.349 ; C14.2@390.65,109.22 cw(c390.162,108.349) 391.16,108.349 ; C14.2@390.65,109.22 cw(c390.162,108.349) 391.16,108.349 ; C14.2@390.65,109.22 cw(c390.162,108.349) 391.16,108.349 ; C14.2@390.694,108.899 ccw(c389.569,110.023) 391.16,110.023 ; C14.2@390.694,108.899 ccw(c389.569,110.023) 391.16,110.023 ; C14.2@390.694,108.899 ccw(c389.569,110.023) 391.16,110.023 ; C14.2@390.694,108.899 ccw(c389.569,110.023) 391.16,110.023
NetC20_1: C20.1 R8.2 R9.1 U7.6 | length 30.4
  Bottom Layer w0.381: R9.1@375.553,169.672 375.553,167.171 373.927,167.171 372.11,165.354 U7.6@372.11,162.814 372.11,161.29 372.872,160.528 375.045,160.528 R8.2@376.569,159.004 ; 375.143,167.171 cw(c375.143,166.761) C20.1@375.433,167.051 ; 375.143,167.171 cw(c375.143,166.761) C20.1@375.433,167.051 ; 375.143,167.171 cw(c375.143,166.761) C20.1@375.433,167.051 ; 375.143,167.171 cw(c375.143,166.761) C20.1@375.433,167.051 ; R9.1@375.281,169.3 cw(c374.625,168.644) 375.553,168.644 ; R9.1@375.281,169.3 cw(c374.625,168.644) 375.553,168.644 ; R9.1@375.281,169.3 cw(c374.625,168.644) 375.553,168.644 ; R9.1@375.281,169.3 cw(c374.625,168.644) 375.553,168.644 ; C20.1@375.433,167.543 ccw(c375.143,167.833) 375.553,167.833 ; C20.1@375.433,167.543 ccw(c375.143,167.833) 375.553,167.833 ; C20.1@375.433,167.543 ccw(c375.143,167.833) 375.553,167.833 ; C20.1@375.433,167.543 ccw(c375.143,167.833) 375.553,167.833 ; 375.553,168.644 cw(c376.481,168.644) R9.1@375.825,169.3 ; 375.553,168.644 cw(c376.481,168.644) R9.1@375.825,169.3 ; 375.553,168.644 cw(c376.481,168.644) R9.1@375.825,169.3 ; 375.553,168.644 cw(c376.481,168.644) R9.1@375.825,169.3 ; 375.742,159.831 ccw(c376.569,160.658) R8.2@376.569,159.488 ; 375.742,159.831 ccw(c376.569,160.658) R8.2@376.569,159.488 ; 375.742,159.831 ccw(c376.569,160.658) R8.2@376.569,159.488 ; 375.742,159.831 ccw(c376.569,160.658) R8.2@376.569,159.488 ; 375.983,159.59 cw(c375.498,159.104) R8.2@376.185,159.104 ; 375.983,159.59 cw(c375.498,159.104) R8.2@376.185,159.104 ; 375.983,159.59 cw(c375.498,159.104) R8.2@376.185,159.104 ; 375.983,159.59 cw(c375.498,159.104) R8.2@376.185,159.104
NetCbs1_1: Cbs1.1 Dbs1.2 U7.8 | length 29.6
  Bottom Layer w0.381: Dbs1.2@363.728,161.527 364.253,162.052 Cbs1.1@367.284,162.052 368.046,162.814 U7.8@369.57,162.814 ; Dbs1.2@363.669,161.706 cw(c364.506,160.869) Dbs1.2@364.506,162.052 ; Dbs1.2@363.669,161.706 cw(c364.506,160.869) Dbs1.2@364.506,162.052 ; Dbs1.2@363.669,161.706 cw(c364.506,160.869) Dbs1.2@364.506,162.052 ; Dbs1.2@363.669,161.706 cw(c364.506,160.869) Dbs1.2@364.506,162.052 ; Dbs1.2@363.939,161.436 cw(c365.426,159.949) 365.426,162.052 ; Dbs1.2@363.939,161.436 cw(c365.426,159.949) 365.426,162.052 ; Dbs1.2@363.939,161.436 cw(c365.426,159.949) 365.426,162.052 ; Dbs1.2@363.939,161.436 cw(c365.426,159.949) 365.426,162.052 ; Dbs1.2@364.208,161.167 cw(c366.346,159.029) 366.346,162.052 ; Dbs1.2@364.208,161.167 cw(c366.346,159.029) 366.346,162.052 ; Dbs1.2@364.208,161.167 cw(c366.346,159.029) 366.346,162.052 ; Dbs1.2@364.208,161.167 cw(c366.346,159.029) 366.346,162.052 ; Cbs1.1@367.728,162.052 cw(c368.802,162.052) 368.043,162.811 ; Cbs1.1@367.728,162.052 cw(c368.802,162.052) 368.043,162.811 ; Cbs1.1@367.728,162.052 cw(c368.802,162.052) 368.043,162.811 ; Cbs1.1@367.728,162.052 cw(c368.802,162.052) 368.043,162.811
NetD4_1: D4.1 R7.1 R8.1 | length 47.2
  Bottom Layer w0.381: D4.1@369.299,151.384 369.375,151.46 375.488,151.46 378.319,154.291 R8.1@378.319,159.004 ; D4.1@369.39,150.905 cw(c370.73,149.565) 370.73,151.46 ; D4.1@369.39,150.905 cw(c370.73,149.565) 370.73,151.46 ; D4.1@369.39,150.905 cw(c370.73,149.565) 370.73,151.46 ; D4.1@369.39,150.905 cw(c370.73,149.565) 370.73,151.46 ; D4.1@369.659,150.636 cw(c371.65,148.645) 371.65,151.46 ; D4.1@369.659,150.636 cw(c371.65,148.645) 371.65,151.46 ; D4.1@369.659,150.636 cw(c371.65,148.645) 371.65,151.46 ; D4.1@369.659,150.636 cw(c371.65,148.645) 371.65,151.46 ; R7.1@378.047,155.584 cw(c377.391,154.928) 378.319,154.928 ; R7.1@378.047,155.584 cw(c377.391,154.928) 378.319,154.928 ; R7.1@378.047,155.584 cw(c377.391,154.928) 378.319,154.928 ; R7.1@378.047,155.584 cw(c377.391,154.928) 378.319,154.928 ; R7.1@378.047,156.328 ccw(c377.391,156.984) 378.319,156.984 ; R7.1@378.047,156.328 ccw(c377.391,156.984) 378.319,156.984 ; R7.1@378.047,156.328 ccw(c377.391,156.984) 378.319,156.984 ; R7.1@378.047,156.328 ccw(c377.391,156.984) 378.319,156.984 ; R8.1@378.047,158.632 cw(c377.391,157.976) 378.319,157.976 ; R8.1@378.047,158.632 cw(c377.391,157.976) 378.319,157.976 ; R8.1@378.047,158.632 cw(c377.391,157.976) 378.319,157.976 ; R8.1@378.047,158.632 cw(c377.391,157.976) 378.319,157.976 ; 378.319,154.928 cw(c379.247,154.928) R7.1@378.591,155.584 ; 378.319,154.928 cw(c379.247,154.928) R7.1@378.591,155.584 ; 378.319,154.928 cw(c379.247,154.928) R7.1@378.591,155.584 ; 378.319,154.928 cw(c379.247,154.928) R7.1@378.591,155.584 ; 378.319,156.984 ccw(c379.247,156.984) R7.1@378.591,156.328 ; 378.319,156.984 ccw(c379.247,156.984) R7.1@378.591,156.328 ; 378.319,156.984 ccw(c379.247,156.984) R7.1@378.591,156.328 ; 378.319,156.984 ccw(c379.247,156.984) R7.1@378.591,156.328 ; 378.319,157.976 cw(c379.247,157.976) R8.1@378.591,158.632 ; 378.319,157.976 cw(c379.247,157.976) R8.1@378.591,158.632 ; 378.319,157.976 cw(c379.247,157.976) R8.1@378.591,158.632 ; 378.319,157.976 cw(c379.247,157.976) R8.1@378.591,158.632
NetD5_2: D5.2 R7.2 Rg1.2 U7.7 | length 47.6
  Bottom Layer w0.381: D5.2@366.251,169.672 366.251,166.889 ; R7.2@376.569,155.956 375.412,155.956 374.65,156.718 374.65,158.242 373.888,159.004 371.856,159.004 370.84,160.02 U7.7@370.84,162.814 370.84,164.592 369.316,166.116 Rg1.2@365.478,166.116 366.251,166.889 ; Rg1.2@365.498,166.6 ccw(c365.55,167.59) 366.251,166.889 ; Rg1.2@365.498,166.6 ccw(c365.55,167.59) 366.251,166.889 ; Rg1.2@365.498,166.6 ccw(c365.55,167.59) 366.251,166.889 ; Rg1.2@365.498,166.6 ccw(c365.55,167.59) 366.251,166.889 ; Rg1.2@365.75,165.844 cw(c366.406,165.188) 366.406,166.116 ; Rg1.2@365.75,165.844 cw(c366.406,165.188) 366.406,166.116 ; Rg1.2@365.75,165.844 cw(c366.406,165.188) 366.406,166.116 ; Rg1.2@365.75,165.844 cw(c366.406,165.188) 366.406,166.116 ; Rg1.2@365.75,166.388 ccw(c366.406,167.044) 366.406,166.116 ; Rg1.2@365.75,166.388 ccw(c366.406,167.044) 366.406,166.116 ; Rg1.2@365.75,166.388 ccw(c366.406,167.044) 366.406,166.116 ; Rg1.2@365.75,166.388 ccw(c366.406,167.044) 366.406,166.116 ; Rg1.2@365.862,166.216 cw(c366.549,166.216) 366.064,166.702 ; Rg1.2@365.862,166.216 cw(c366.549,166.216) 366.064,166.702 ; Rg1.2@365.862,166.216 cw(c366.549,166.216) 366.064,166.702 ; Rg1.2@365.862,166.216 cw(c366.549,166.216) 366.064,166.702 ; D5.2@365.891,169.192 cw(c365.021,168.322) 366.251,168.322 ; D5.2@365.891,169.192 cw(c365.021,168.322) 366.251,168.322 ; D5.2@365.891,169.192 cw(c365.021,168.322) 366.251,168.322 ; D5.2@365.891,169.192 cw(c365.021,168.322) 366.251,168.322 ; 366.251,168.322 cw(c367.481,168.322) D5.2@366.611,169.192 ; 366.251,168.322 cw(c367.481,168.322) D5.2@366.611,169.192 ; 366.251,168.322 cw(c367.481,168.322) D5.2@366.611,169.192 ; 366.251,168.322 cw(c367.481,168.322) D5.2@366.611,169.192 ; 375.641,155.956 cw(c375.641,155.028) R7.2@376.297,155.684 ; 375.641,155.956 ccw(c375.641,156.884) R7.2@376.297,156.228 ; 375.641,155.956 cw(c375.641,155.028) R7.2@376.297,155.684 ; 375.641,155.956 ccw(c375.641,156.884) R7.2@376.297,156.228 ; 375.641,155.956 cw(c375.641,155.028) R7.2@376.297,155.684 ; 375.641,155.956 ccw(c375.641,156.884) R7.2@376.297,156.228 ; 375.641,155.956 cw(c375.641,155.028) R7.2@376.297,155.684 ; 375.641,155.956 ccw(c375.641,156.884) R7.2@376.297,156.228
NetD6_1: D6.1 R10.1 | length 32.7
  Bottom Layer w0.381: R10.1@375.082,147.599 378.079,147.599 D6.1@378.612,147.066 ; R10.1@375.442,147.239 cw(c376.312,146.369) 376.312,147.599 ; R10.1@375.442,147.239 cw(c376.312,146.369) 376.312,147.599 ; R10.1@375.442,147.239 cw(c376.312,146.369) 376.312,147.599 ; R10.1@375.442,147.239 cw(c376.312,146.369) 376.312,147.599 ; R10.1@375.442,147.96 ccw(c376.312,148.829) 376.312,147.599 ; R10.1@375.442,147.96 ccw(c376.312,148.829) 376.312,147.599 ; R10.1@375.442,147.96 ccw(c376.312,148.829) 376.312,147.599 ; R10.1@375.442,147.96 ccw(c376.312,148.829) 376.312,147.599 ; 375.974,147.599 cw(c375.974,144.428) D6.1@378.217,146.67 ; 375.974,147.599 cw(c375.974,144.428) D6.1@378.217,146.67 ; 375.974,147.599 cw(c375.974,144.428) D6.1@378.217,146.67 ; 375.974,147.599 cw(c375.974,144.428) D6.1@378.217,146.67 ; 376.894,147.599 cw(c376.894,145.347) D6.1@378.486,146.94 ; 376.894,147.599 cw(c376.894,145.347) D6.1@378.486,146.94 ; 376.894,147.599 cw(c376.894,145.347) D6.1@378.486,146.94 ; 376.894,147.599 cw(c376.894,145.347) D6.1@378.486,146.94 ; 377.814,147.599 cw(c377.814,146.267) D6.1@378.756,147.209 ; 377.814,147.599 cw(c377.814,146.267) D6.1@378.756,147.209 ; 377.814,147.599 cw(c377.814,146.267) D6.1@378.756,147.209 ; 377.814,147.599 cw(c377.814,146.267) D6.1@378.756,147.209
NetR2_2: R2.2 U2.17 | length 10.6
  Bottom Layer w0.381: U2.17@348.234,129.142 348.234,133.745 R2.2@348.347,133.858 ; R2.2@348.075,133.486 cw(c347.692,133.103) 348.234,133.103 ; R2.2@348.075,133.486 cw(c347.692,133.103) 348.234,133.103 ; R2.2@348.075,133.486 cw(c347.692,133.103) 348.234,133.103 ; R2.2@348.075,133.486 cw(c347.692,133.103) 348.234,133.103 ; 348.234,132.557 cw(c349.548,132.557) R2.2@348.619,133.486 ; 348.234,132.557 cw(c349.548,132.557) R2.2@348.619,133.486 ; 348.234,132.557 cw(c349.548,132.557) R2.2@348.619,133.486 ; 348.234,132.557 cw(c349.548,132.557) R2.2@348.619,133.486
NetR4_1: R4.1 U3.8 | length 10.4
  Bottom Layer w0.381: R4.1@345.807,113.03 347.726,111.111 U3.8@347.726,109.22 ; R4.1@345.807,112.546 cw(c345.807,111.376) 346.634,112.203 ; R4.1@345.807,112.546 cw(c345.807,111.376) 346.634,112.203 ; R4.1@345.807,112.546 cw(c345.807,111.376) 346.634,112.203 ; R4.1@345.807,112.546 cw(c345.807,111.376) 346.634,112.203 ; R4.1@346.191,112.93 ccw(c346.878,112.93) 346.393,112.444 ; R4.1@346.191,112.93 ccw(c346.878,112.93) 346.393,112.444 ; R4.1@346.191,112.93 ccw(c346.878,112.93) 346.393,112.444 ; R4.1@346.191,112.93 ccw(c346.878,112.93) 346.393,112.444
ON/OFF: U1.6
POTENTIOMETER: U1.23
PWM: U1.15 U7.2 | length 27.7
  Bottom Layer w0.381: U1.15@364.236,142.494 364.236,147.335 366.757,149.857 366.757,152.459 368.045,153.746 370.205,153.746 370.811,154.353 370.811,156.385 U7.2@370.865,156.439 ; U1.15@363.84,142.89 ccw(c362.885,143.845) 364.236,143.845 ; U1.15@363.84,142.89 ccw(c362.885,143.845) 364.236,143.845 ; U1.15@363.84,142.89 ccw(c362.885,143.845) 364.236,143.845 ; U1.15@363.84,142.89 ccw(c362.885,143.845) 364.236,143.845 ; 364.236,143.845 ccw(c365.587,143.845) U1.15@364.632,142.89 ; 364.236,143.845 ccw(c365.587,143.845) U1.15@364.632,142.89 ; 364.236,143.845 ccw(c365.587,143.845) U1.15@364.632,142.89 ; 364.236,143.845 ccw(c365.587,143.845) U1.15@364.632,142.89 ; 370.811,155.136 cw(c371.215,155.136) U7.2@370.93,155.422 ; 370.811,155.136 cw(c371.215,155.136) U7.2@370.93,155.422 ; 370.811,155.136 cw(c371.215,155.136) U7.2@370.93,155.422 ; 370.811,155.136 cw(c371.215,155.136) U7.2@370.93,155.422
RXCAN: U2.2 U3.4 | length 30.5
  Bottom Layer w0.381: U3.4@341.376,105.41 339.344,105.41 338.455,106.299 338.455,120.269 341.122,122.936 347.472,122.936 348.234,122.174 U2.2@348.234,120.142
SINK_T: U1.27
SOURCE: C1.2 C2.1 C3.1 C4.1 C6.2 C7.1 C8.1 C9.2 C10.2 C11.2 C12.1 C13.1 C14.1 C15.1 C16.1 C17.1 C18.1 C19.2 C20.2 Cbs1.2 D6.2 DZ1.1 P1.2 P2.1 P7.1 P7.2 P7.3 P7.4 R4.2 R6.1 R9.2 Rgpd1.2 U1.8 U1.22 U2.9 U3.2 U5.2 U6.2 U7.4 U7.5 | length 103.7
  Top Layer w0.381: v1(340.868,126.492) 341.503,127 343.535,129.032 v1(343.408,129.032) ; v1(375.183,153.949) v1(378.231,150.901) ; v1(375.793,117.856) v1(375.793,121.666) ; v1@340.868,127.051 ccw(c340.868,128.709) 342.04,127.537 ; v1@340.868,127.051 ccw(c340.868,128.709) 342.04,127.537 ; v1@340.868,127.051 ccw(c340.868,128.709) 342.04,127.537 ; v1@340.868,127.051 ccw(c340.868,128.709) 342.04,127.537 ; v1@341.427,126.492 cw(c342.472,126.492) 341.733,127.23 ; v1@341.427,126.492 cw(c342.472,126.492) 341.733,127.23 ; v1@341.427,126.492 cw(c342.472,126.492) 341.733,127.23 ; v1@341.427,126.492 cw(c342.472,126.492) 341.733,127.23 ; 342.363,127.86 ccw(c341.191,129.032) v1@342.849,129.032 ; 342.363,127.86 ccw(c341.191,129.032) v1@342.849,129.032 ; 342.363,127.86 ccw(c341.191,129.032) v1@342.849,129.032 ; 342.363,127.86 ccw(c341.191,129.032) v1@342.849,129.032 ; 342.67,128.167 cw(c343.408,127.428) v1@343.408,128.473 ; 342.67,128.167 cw(c343.408,127.428) v1@343.408,128.473 ; 342.67,128.167 cw(c343.408,127.428) v1@343.408,128.473 ; 342.67,128.167 cw(c343.408,127.428) v1@343.408,128.473 ; v1@375.183,153.39 cw(c375.183,152.039) 376.139,152.994 ; v1@375.183,153.39 cw(c375.183,152.039) 376.139,152.994 ; v1@375.183,153.39 cw(c375.183,152.039) 376.139,152.994 ; v1@375.183,153.39 cw(c375.183,152.039) 376.139,152.994 ; v1@375.397,118.252 ccw(c374.442,119.207) 375.793,119.207 ; v1@375.397,118.252 ccw(c374.442,119.207) 375.793,119.207 ; v1@375.397,118.252 ccw(c374.442,119.207) 375.793,119.207 ; v1@375.397,118.252 ccw(c374.442,119.207) 375.793,119.207 ; v1@375.397,121.27 cw(c374.442,120.315) 375.793,120.315 ; v1@375.397,121.27 cw(c374.442,120.315) 375.793,120.315 ; v1@375.397,121.27 cw(c374.442,120.315) 375.793,120.315 ; v1@375.397,121.27 cw(c374.442,120.315) 375.793,120.315 ; v1@375.743,153.949 ccw(c377.094,153.949) 376.139,152.994 ; v1@375.743,153.949 ccw(c377.094,153.949) 376.139,152.994 ; v1@375.743,153.949 ccw(c377.094,153.949) 376.139,152.994 ; v1@375.743,153.949 ccw(c377.094,153.949) 376.139,152.994 ; 375.793,119.207 ccw(c377.144,119.207) v1@376.189,118.252 ; 375.793,119.207 ccw(c377.144,119.207) v1@376.189,118.252 ; 375.793,119.207 ccw(c377.144,119.207) v1@376.189,118.252 ; 375.793,119.207 ccw(c377.144,119.207) v1@376.189,118.252 ; 375.793,120.315 cw(c377.144,120.315) v1@376.189,121.27 ; 375.793,120.315 cw(c377.144,120.315) v1@376.189,121.27 ; 375.793,120.315 cw(c377.144,120.315) v1@376.189,121.27 ; 375.793,120.315 cw(c377.144,120.315) v1@376.189,121.27 ; 377.276,151.857 cw(c376.321,150.901) v1@377.672,150.901 ; 377.276,151.857 ccw(c378.231,152.812) v1@378.231,151.461 ; 377.276,151.857 cw(c376.321,150.901) v1@377.672,150.901 ; 377.276,151.857 ccw(c378.231,152.812) v1@378.231,151.461 ; 377.276,151.857 cw(c376.321,150.901) v1@377.672,150.901 ; 377.276,151.857 ccw(c378.231,152.812) v1@378.231,151.461 ; 377.276,151.857 cw(c376.321,150.901) v1@377.672,150.901 ; 377.276,151.857 ccw(c378.231,152.812) v1@378.231,151.461
  Top Layer w0.508: v1(367.284,96.52) v1(370.84,96.52) ; v1@367.635,96.169 cw(c368.481,95.323) 368.481,96.52 ; v1@367.635,96.169 cw(c368.481,95.323) 368.481,96.52 ; v1@367.635,96.169 cw(c368.481,95.323) 368.481,96.52 ; v1@367.635,96.169 cw(c368.481,95.323) 368.481,96.52 ; v1@367.635,96.871 ccw(c368.481,97.717) 368.481,96.52 ; v1@367.635,96.871 ccw(c368.481,97.717) 368.481,96.52 ; v1@367.635,96.871 ccw(c368.481,97.717) 368.481,96.52 ; v1@367.635,96.871 ccw(c368.481,97.717) 368.481,96.52 ; 369.643,96.52 cw(c369.643,95.323) v1@370.489,96.169 ; 369.643,96.52 ccw(c369.643,97.717) v1@370.489,96.871 ; 369.643,96.52 cw(c369.643,95.323) v1@370.489,96.169 ; 369.643,96.52 ccw(c369.643,97.717) v1@370.489,96.871 ; 369.643,96.52 cw(c369.643,95.323) v1@370.489,96.169 ; 369.643,96.52 ccw(c369.643,97.717) v1@370.489,96.871 ; 369.643,96.52 cw(c369.643,95.323) v1@370.489,96.169 ; 369.643,96.52 ccw(c369.643,97.717) v1@370.489,96.871
  Bottom Layer w0.381: 367.309,142.697 365.404,144.602 365.404,146.887 367.9,149.383 367.9,151.985 368.518,152.603 372.821,152.603 373.507,153.289 U7.4@373.507,155.956 ; U7.4@373.29,155.422 cw(c372.767,154.898) 373.507,154.898 ; U7.4@373.29,155.422 cw(c372.767,154.898) 373.507,154.898 ; U7.4@373.29,155.422 cw(c372.767,154.898) 373.507,154.898 ; U7.4@373.29,155.422 cw(c372.767,154.898) 373.507,154.898
TXCAN: U2.1 U3.1 | length 25.6
  Bottom Layer w0.381: U3.1@341.376,109.22 339.598,109.22 339.344,109.474 339.344,119.901 341.363,121.92 346.202,121.92 346.964,121.158 U2.1@346.964,120.142 ; 346.554,121.568 cw(c345.827,120.842) U2.1@346.855,120.842 ; 346.554,121.568 cw(c345.827,120.842) U2.1@346.855,120.842 ; 346.554,121.568 cw(c345.827,120.842) U2.1@346.855,120.842 ; 346.554,121.568 cw(c345.827,120.842) U2.1@346.855,120.842
USART_RTS: C5.2 P1.1 | length 12.2
  Bottom Layer w0.381: C5.2@373.177,104.394 P1.1@376.936,104.394 ; 375.585,104.394 cw(c375.585,103.043) P1.1@376.54,103.998 ; 375.585,104.394 ccw(c375.585,105.745) P1.1@376.54,104.79 ; 375.585,104.394 cw(c375.585,103.043) P1.1@376.54,103.998 ; 375.585,104.394 ccw(c375.585,105.745) P1.1@376.54,104.79 ; 375.585,104.394 cw(c375.585,103.043) P1.1@376.54,103.998 ; 375.585,104.394 ccw(c375.585,105.745) P1.1@376.54,104.79 ; 375.585,104.394 cw(c375.585,103.043) P1.1@376.54,103.998 ; 375.585,104.394 ccw(c375.585,105.745) P1.1@376.54,104.79
USART_RX: P1.4 U1.2 | length 22.1
  Bottom Layer w0.381: U1.2@371.856,112.014 P1.4@376.936,112.014 ; U1.2@372.752,111.618 cw(c373.707,110.663) 373.707,112.014 ; U1.2@372.752,111.618 cw(c373.707,110.663) 373.707,112.014 ; U1.2@372.752,111.618 cw(c373.707,110.663) 373.707,112.014 ; U1.2@372.752,111.618 cw(c373.707,110.663) 373.707,112.014 ; U1.2@372.752,112.41 ccw(c373.707,113.365) 373.707,112.014 ; U1.2@372.752,112.41 ccw(c373.707,113.365) 373.707,112.014 ; U1.2@372.752,112.41 ccw(c373.707,113.365) 373.707,112.014 ; U1.2@372.752,112.41 ccw(c373.707,113.365) 373.707,112.014 ; 375.585,112.014 cw(c375.585,110.663) P1.4@376.54,111.618 ; 375.585,112.014 ccw(c375.585,113.365) P1.4@376.54,112.41 ; 375.585,112.014 cw(c375.585,110.663) P1.4@376.54,111.618 ; 375.585,112.014 ccw(c375.585,113.365) P1.4@376.54,112.41 ; 375.585,112.014 cw(c375.585,110.663) P1.4@376.54,111.618 ; 375.585,112.014 ccw(c375.585,113.365) P1.4@376.54,112.41 ; 375.585,112.014 cw(c375.585,110.663) P1.4@376.54,111.618 ; 375.585,112.014 ccw(c375.585,113.365) P1.4@376.54,112.41